# EAGLE board ArduinoMegaConnectorV2 (EAGLE 5.11)
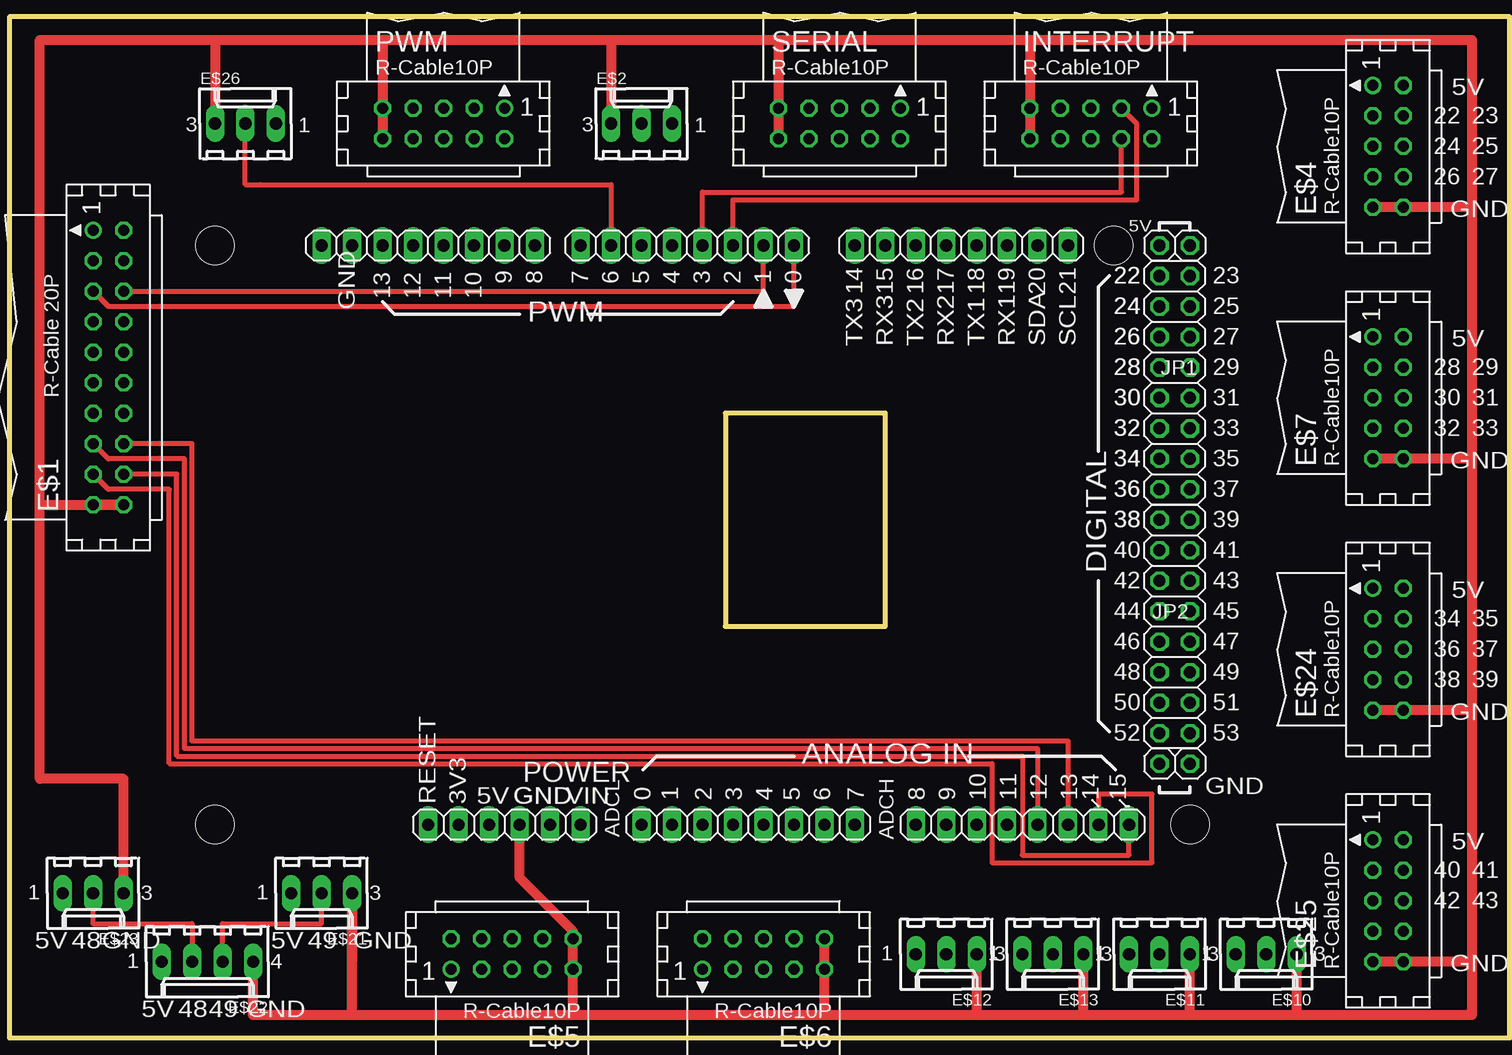
[diagram p0: board, top side]
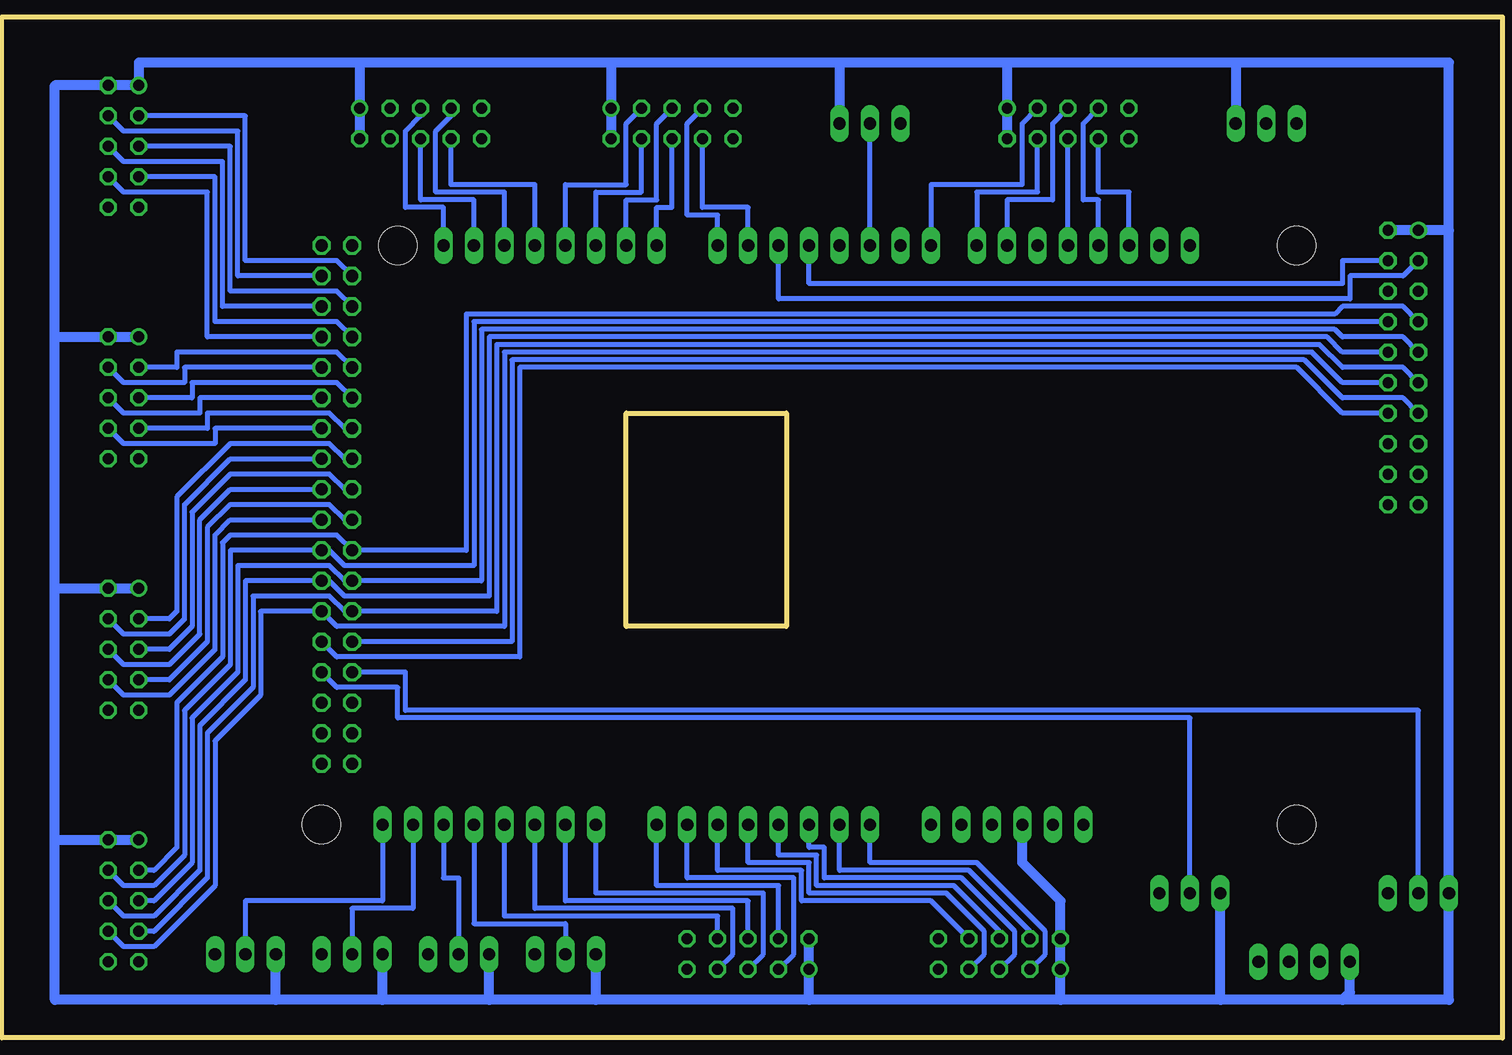
[diagram p1: board, bottom side, seen from below]

No outline drawn. Coordinates in mm, seen from the top.
Copper layers (1*16): Top 0.035mm / dielectric 1.5mm / Bottom 0.035mm
Design rules "default *": minimum track width 8mil, minimum drill 16mil, track to track 8mil, track to pad 8mil, pad to pad 8mil, via to via 10mil, smd to smd 8mil, copper to edge 40mil, drill to drill 12mil, minimum pad ring 10mil, minimum via ring 10mil, stop-mask expansion 4mil, vias tented up to drill 0mil, thermal gap 10mil
Net classes: 0 default: width 0.203 mm, drill 0.406 mm, clearance 0.203 mm; 1 power: width 0.61 mm, drill 0.711 mm, clearance 0.203 mm; 2 gnd: width 0.305 mm, drill 0.711 mm, clearance 0.203 mm; 3 usbvcc: width 0.508 mm, drill 0.711 mm, clearance 0.203 mm
Holes 3.2 mm at 98.42,17.78 17.14,66.04 92.08,66.04 17.14,17.78
Milling: 8 lines

## Footprints (pad centres in the part's own frame; a part is rotated, then mirrored left to right if it is on the bottom)
1X08 = drill 1.016 long: 1 -8.89,0; 2 -6.35,0; 3 -3.81,0; 4 -1.27,0; 5 1.27,0; 6 3.81,0; 7 6.35,0; 8 8.89,0
CON20L = drill 0.914 round: 1 11.43,1.27 | drill 0.914 octagon: 2 11.43,-1.27; 3 8.89,1.27; 4 8.89,-1.27; 5 6.35,1.27; 6 6.35,-1.27; 7 3.81,1.27; 8 3.81,-1.27; 9 1.27,1.27; 10 1.27,-1.27; 11 -1.27,1.27; 12 -1.27,-1.27; 13 -3.81,1.27; 14 -3.81,-1.27; 15 -6.35,1.27; 16 -6.35,-1.27; 17 -8.89,1.27; 18 -8.89,-1.27; 19 -11.43,1.27; 20 -11.43,-1.27
6410-03 = drill 1.016 long: 1 2.54,0; 2 0,0; 3 -2.54,0
CON10L = drill 0.914 round: 1 5.08,1.27 | drill 0.914 octagon: 2 5.08,-1.27; 3 2.54,1.27; 4 2.54,-1.27; 5 0,1.27; 6 0,-1.27; 7 -2.54,1.27; 8 -2.54,-1.27; 9 -5.08,1.27; 10 -5.08,-1.27
6410-04 = drill 1.016 long: 1 3.81,0; 2 1.27,0; 3 -1.27,0; 4 -3.81,0
2X08 = drill 1.016 octagon: 1 -8.89,-1.27; 2 -8.89,1.27; 3 -6.35,-1.27; 4 -6.35,1.27; 5 -3.81,-1.27; 6 -3.81,1.27; 7 -1.27,-1.27; 8 -1.27,1.27; 9 1.27,-1.27; 10 1.27,1.27; 11 3.81,-1.27; 12 3.81,1.27; 13 6.35,-1.27; 14 6.35,1.27; 15 8.89,-1.27; 16 8.89,1.27
1X01 = drill 1.016 octagon: 1 0,0
1X06 = drill 1.016 long: 1 -6.35,0; 2 -3.81,0; 3 -1.27,0; 4 1.27,0; 5 3.81,0; 6 6.35,0

## Placement (x,y rotation side)
ADCH  [1X08]  84.45,17.78 0 top
ADCL  [1X08]  61.59,17.78 0 top
COMMUNICATION  [1X08]  79.38,66.04 180 top
E$1  [CON20L]  8.26,55.88 90 top
E$2  [6410-03]  52.7,76.2 0 top
E$4  [CON10L]  114.94,74.3 90 top
E$5  [CON10L]  41.91,6.99 180 top
E$6  [CON10L]  62.87,6.99 180 top
E$7  [CON10L]  114.94,53.34 90 top
E$10  [6410-03]  104.78,6.99 180 top
E$11  [6410-03]  95.89,6.99 180 top
E$12  [6410-03]  78.11,6.99 180 top
E$13  [6410-03]  87,6.99 180 top
E$21  [6410-03]  26.04,12.06 180 top
E$22  [6410-04]  16.51,6.35 180 top
E$23  [6410-03]  6.99,12.06 180 top
E$24  [CON10L]  114.94,32.38 90 top
E$25  [CON10L]  114.94,11.43 90 top
E$26  [6410-03]  19.68,76.2 0 top
INTERRUPT  [CON10L]  90.17,76.2 0 top
JP1  [2X08]  97.16,54.61 90 top
JP2  [2X08]  97.16,34.29 90 top
JP3  [1X01]  95.89,66.04 0 top
JP4  [1X01]  98.42,66.04 0 top
JP5  [1X01]  95.89,22.86 0 top
JP6  [1X01]  98.42,22.86 0 top
POWER  [1X06]  41.27,17.78 0 top
PWM  [CON10L]  36.2,76.2 0 top
PWMH  [1X08]  34.92,66.04 180 top
PWML  [1X08]  56.52,66.04 180 top
SERIAL  [CON10L]  69.22,76.2 0 top

## Library data of the parts
ADCH ADCL COMMUNICATION JP1-JP6 POWER PWMH PWML = pinhead
E$1 E$4-E$7 E$24 E$25 INTERRUPT PWM SERIAL = con-harting
E$2 E$10-E$13 E$21-E$23 E$26 = con-molex

## Nets
S$2: E$7.3 JP1.10
S$3: PWM.3 PWML.8
S$4: PWM.4 PWMH.1
S$5: PWM.5 PWMH.2
S$6: PWM.6 PWMH.4
S$7: PWM.7 PWMH.5
S$8: PWM.8 PWMH.6
S$9: E$1.1 E$1.2 E$2.1 E$4.1 E$4.2 E$5.1 E$5.2 E$6.1 E$6.2 E$7.1 E$7.2 E$10.1 E$11.1 E$12.1 E$13.1 E$21.1 E$22.1 E$23.1 E$24.1 E$24.2 E$25.1 E$25.2 E$26.1 INTERRUPT.1 INTERRUPT.2 POWER.3 PWM.1 PWM.2 SERIAL.1 SERIAL.2
S$10: E$1.3 INTERRUPT.3 PWML.3
S$11: E$1.4 INTERRUPT.4 PWML.4
S$12: COMMUNICATION.1 INTERRUPT.5
S$13: COMMUNICATION.2 INTERRUPT.6
S$14: COMMUNICATION.3 INTERRUPT.7
S$15: COMMUNICATION.4 INTERRUPT.8
S$16: ADCH.5 E$1.15 E$12.2
S$17: COMMUNICATION.5 SERIAL.3
S$19: COMMUNICATION.7 SERIAL.5
S$20: COMMUNICATION.8 SERIAL.6
S$21: E$26.2 PWML.7
S$22: COMMUNICATION.6 SERIAL.4
S$23: E$4.3 JP1.16
S$24: E$4.4 JP1.15
S$25: E$4.5 JP1.14
S$26: E$4.6 JP1.13
S$27: E$4.7 JP1.12
S$28: E$4.8 JP1.11
S$29: ADCH.6 E$1.16 E$13.2
S$30: E$21.2 E$22.3 JP2.5
S$32: E$7.4 JP1.9
S$33: E$7.5 JP1.8
S$34: E$7.6 JP1.7
S$35: E$7.7 JP1.6
S$36: E$7.8 JP1.5
S$37: ADCL.1 E$5.3
S$38: ADCL.2 E$5.4
S$39: ADCL.3 E$5.5
S$40: ADCL.4 E$5.6
S$41: ADCL.5 E$5.7
S$42: ADCL.6 E$5.8
S$43: ADCL.7 E$6.3
S$44: ADCL.8 E$6.4
S$45: ADCH.1 E$6.5
S$46: ADCH.2 E$6.6
S$47: ADCH.3 E$6.7
S$48: ADCH.4 E$6.8
S$49: ADCH.7 E$1.17 E$11.2
S$50: ADCH.8 E$1.18 E$10.2
S$51: E$1.9 E$25.5 JP2.12
S$54: E$1.12 E$25.8 JP2.9
S$55: E$2.2 PWML.6
S$57: E$1.19 E$1.20 E$2.3 E$4.9 E$4.10 E$5.9 E$5.10 E$6.9 E$6.10 E$7.9 E$7.10 E$10.3 E$11.3 E$12.3 E$13.3 E$21.3 E$22.4 E$23.3 E$24.9 E$24.10 E$25.9 E$25.10 E$26.3 INTERRUPT.9 INTERRUPT.10 POWER.4 PWM.9 PWM.10 SERIAL.9 SERIAL.10
S$58: E$1.5 PWML.1 SERIAL.7
S$60: E$24.3 JP1.4
S$61: E$24.4 JP1.3
S$62: E$24.5 JP1.2
S$63: E$24.6 JP1.1
S$64: E$24.7 JP2.16
S$65: E$24.8 JP2.15
S$66: E$1.7 E$25.3 JP2.14
S$67: E$1.8 E$25.4 JP2.13
S$68: E$22.2 E$23.2 JP2.6
S$73: E$1.6 PWML.2 SERIAL.8
S$80: E$1.10 E$25.6 JP2.11
S$81: E$1.11 E$25.7 JP2.10
S$91: E$1.13 JP2.8
S$92: E$1.14 JP2.7

## Tracks (layer width: path | path; a pad name or v marks a point on that pad's centre or on a via)
S$2
  Bottom 0.406: JP1.10 97.16,57.15 110.49,57.15 110.49,55.88 E$7.3
S$3
  Bottom 0.406: PWM.3 40.01,76.2 40.01,71.12 47.62,71.12 PWML.8
S$4
  Bottom 0.406: PWM.4 38.73,70.48 40.64,70.48 41.27,70.48 43.81,70.48 PWMH.1
S$5
  Bottom 0.406: PWM.5 37.47,76.2 37.47,69.85 41.27,69.85 PWMH.2
S$6
  Bottom 0.406: PWMH.4 PWM.6
S$7
  Bottom 0.406: PWMH.5 33.66,69.85 34.92,69.85 34.92,76.2 PWM.7
S$8
  Bottom 0.406: PWMH.6 31.11,70.48 33.66,70.48 PWM.8
S$9
  Bottom 0.813: POWER.3 40.01,14.61 36.83,11.43 E$5.2 E$5.1 36.83,3.17 | E$6.2 E$6.1 57.78,3.17 | 36.83,3.17 57.78,3.17 | 75.56,3.17 E$12.1 | 57.78,3.17 75.56,3.17 | 84.45,3.17 E$13.1 | 75.56,3.17 84.45,3.17 | 93.34,3.17 E$11.1 | 84.45,3.17 93.34,3.17 | 102.23,3.17 E$10.1 | 93.34,3.17 102.23,3.17 | 102.23,3.17 120.65,3.17 120.65,16.51 | E$25.1 E$25.2 120.65,16.51 | E$24.1 E$24.2 120.65,37.47 | 120.65,16.51 120.65,37.47 | E$7.1 E$7.2 120.65,58.42 | 120.65,37.47 120.65,58.42 | 120.65,58.42 120.65,79.38 E$4.2 E$4.1 113.67,81.28 95.25,81.28 | INTERRUPT.2 INTERRUPT.1 95.25,81.28 | SERIAL.2 SERIAL.1 74.3,81.28 | 74.3,81.28 95.25,81.28 | PWM.2 PWM.1 41.27,81.28 | 55.24,81.28 74.3,81.28 | 55.24,81.28 E$2.1 | 41.27,81.28 55.24,81.28 | 22.23,81.28 41.27,81.28 | 22.23,81.28 E$26.1 | E$1.2 E$1.1 4.45,67.31 | 22.23,81.28 4.45,81.28 4.45,67.31 | 4.45,67.31 E$23.1 4.45,3.17 13.34,3.17 | 13.34,3.17 23.5,3.17 | 23.5,3.17 36.83,3.17 | 13.34,3.17 12.7,3.81 E$22.1 | 23.5,3.17 E$21.1
S$10
  Top 0.406: PWML.3 60.33,69.85 93.98,69.85 93.98,76.2 INTERRUPT.3
  Bottom 0.406: E$1.3 8.26,63.5 12.7,63.5 12.7,61.59 60.33,61.59 PWML.3
S$11
  Top 0.406: PWML.4 57.78,70.48 92.71,70.48 INTERRUPT.4
  Bottom 0.406: PWML.4 57.78,62.87 13.34,62.87 13.34,64.77 E$1.4
S$12
  Bottom 0.406: COMMUNICATION.1 88.27,69.22 91.44,69.22 91.44,75.56 90.17,76.83 INTERRUPT.5
S$13
  Bottom 0.406: COMMUNICATION.2 85.72,69.85 90.17,69.85 INTERRUPT.6
S$14
  Bottom 0.406: COMMUNICATION.3 83.19,70.48 88.9,70.48 88.9,75.56 87.63,76.83 INTERRUPT.7
S$15
  Bottom 0.406: COMMUNICATION.4 80.64,71.12 87.63,71.12 INTERRUPT.8
S$16
  Top 0.406: E$1.15 8.26,48.26 14.61,48.26 14.61,24.13 85.72,24.13 ADCH.5
  Bottom 0.406: ADCH.5 85.72,9.53 78.11,9.53 E$12.2
S$17
  Bottom 0.406: COMMUNICATION.5 78.11,71.12 73.03,71.12 73.03,76.2 SERIAL.3
S$19
  Bottom 0.406: COMMUNICATION.7 73.03,69.85 70.48,69.85 70.48,76.2 SERIAL.5
S$20
  Bottom 0.406: COMMUNICATION.8 70.48,69.22 69.22,69.22 SERIAL.6
S$21
  Top 0.406: E$26.2 19.68,71.12 20.95,71.12 50.16,71.12 PWML.7
S$22
  Bottom 0.406: 75.56,67.31 COMMUNICATION.6 75.56,70.48 71.75,70.48 SERIAL.4
S$23
  Bottom 0.406: JP1.16 97.16,64.77 104.78,64.77 104.78,76.83 E$4.3
S$24
  Bottom 0.406: E$4.4 114.94,75.56 105.41,75.56 105.41,63.5 JP1.15
S$25
  Bottom 0.406: JP1.14 97.16,62.23 106.05,62.23 106.05,74.3 E$4.5
S$26
  Bottom 0.406: E$4.6 114.94,73.03 106.68,73.03 106.68,60.96 JP1.13
S$27
  Bottom 0.406: JP1.12 97.16,59.69 107.31,59.69 107.31,71.75 E$4.7
S$28
  Bottom 0.406: E$4.8 114.94,70.48 107.95,70.48 107.95,58.42 JP1.11
S$29
  Top 0.406: E$1.16 15.24,49.53 15.24,24.77 88.27,24.77 ADCH.6
  Bottom 0.406: ADCH.6 88.27,13.34 87,13.34 E$13.2
S$30
  Top 0.406: E$21.2 26.04,9.53 17.78,9.53 E$22.3
  Bottom 0.406: JP2.5 97.16,29.21 92.08,29.21 92.08,26.67 26.04,26.67 E$21.2
S$32
  Bottom 0.406: E$7.4 114.94,54.61 109.86,54.61 109.86,55.88 JP1.9
S$33
  Bottom 0.406: JP1.8 97.16,54.61 109.22,54.61 109.22,53.34 E$7.5
S$34
  Bottom 0.406: E$7.6 114.94,52.07 108.58,52.07 108.58,53.34 JP1.7
S$35
  Bottom 0.406: JP1.6 96.52,50.8 97.79,52.07 107.95,52.07 107.95,50.8 E$7.7
S$36
  Bottom 0.406: E$7.8 114.94,49.53 107.31,49.53 107.31,50.8 JP1.5
S$37
  Bottom 0.406: ADCL.1 52.7,14.61 43.81,14.61 38.1,8.89 38.1,6.99 E$5.3
S$38
  Bottom 0.406: ADCL.2 55.24,13.97 44.45,13.97 39.37,8.89 E$5.4
S$39
  Bottom 0.406: E$5.5 40.64,6.99 40.64,8.89 45.09,13.34 56.52,13.34 56.52,15.88 57.78,15.88 ADCL.3
S$40
  Bottom 0.406: ADCL.4 60.33,15.24 57.15,15.24 57.15,12.7 45.72,12.7 41.91,8.89 E$5.6
S$41
  Bottom 0.406: ADCL.5 62.87,14.61 57.78,14.61 57.78,12.06 46.35,12.06 43.18,8.89 43.18,6.99 E$5.7
S$42
  Bottom 0.406: ADCL.6 65.41,13.97 58.42,13.97 58.42,11.43 47.62,11.43 E$5.8
S$43
  Bottom 0.406: E$6.3 59.05,6.99 59.05,13.34 67.94,13.34 ADCL.7
S$44
  Bottom 0.406: ADCL.8 70.48,12.7 60.33,12.7 E$6.4
S$45
  Bottom 0.406: E$6.5 61.59,6.99 61.59,12.06 75.56,12.06 ADCH.1
S$46
  Bottom 0.406: ADCH.2 78.11,11.43 62.87,11.43 E$6.6
S$47
  Bottom 0.406: E$6.7 64.14,6.99 64.14,10.79 80.64,10.79 ADCH.3
S$48
  Bottom 0.406: ADCH.4 83.19,10.16 65.41,10.16 E$6.8
S$49
  Top 0.406: E$1.17 8.26,45.72 13.34,45.72 13.34,22.86 81.92,22.86 81.92,14.61 95.25,14.61 95.25,20.32 90.81,20.32 ADCH.7
  Bottom 0.406: ADCH.7 90.81,10.79 95.89,10.79 E$11.2
S$50
  Top 0.406: ADCH.8 93.34,15.24 84.45,15.24 84.45,23.5 13.97,23.5 13.97,46.99 E$1.18
  Bottom 0.406: E$10.2 104.78,11.43 93.34,11.43 ADCH.8
S$51
  Bottom 0.406: E$25.5 112.39,11.43 109.22,14.61 109.22,26.67 105.41,30.48 105.41,39.37 97.79,39.37 96.52,38.1 JP2.12 85.09,38.1 85.09,59.05 13.97,59.05 13.34,58.42 8.26,58.42 E$1.9
S$54
  Bottom 0.406: E$25.8 114.94,7.62 112.39,7.62 107.31,12.7 107.31,24.77 103.5,28.57 103.5,35.56 JP2.9 97.16,34.29 83.19,34.29 83.19,57.15 15.88,57.15 13.34,54.61 E$1.12
S$55
  Bottom 0.406: PWML.6 E$2.2
S$57
  Top 0.813: POWER.4 42.55,13.34 46.99,8.89 E$5.10 E$5.9 46.99,1.91 | E$6.10 E$6.9 67.94,1.91 | 67.94,1.91 46.99,1.91 | 80.64,1.91 67.94,1.91 | 80.64,1.91 E$12.3 | 89.53,1.91 80.64,1.91 | 89.53,1.91 E$13.3 | 98.42,1.91 E$11.3 | 98.42,1.91 89.53,1.91 | 107.31,1.91 E$10.3 | 107.31,1.91 98.42,1.91 | E$25.9 E$25.10 121.92,6.35 | 107.31,1.91 121.92,1.91 121.92,6.35 | E$24.9 E$24.10 121.92,27.3 | 121.92,27.3 121.92,6.35 | E$7.9 E$7.10 121.92,48.26 | 121.92,48.26 121.92,27.3 | E$4.9 E$4.10 121.92,69.22 | 121.92,69.22 121.92,48.26 | INTERRUPT.10 INTERRUPT.9 85.09,83.19 | 121.92,69.22 121.92,83.19 85.09,83.19 | 28.57,6.35 E$21.3 28.57,1.91 | SERIAL.10 SERIAL.9 64.14,83.19 | 64.14,83.19 85.09,83.19 | 50.16,83.19 64.14,83.19 | 50.16,83.19 E$2.3 | PWM.10 PWM.9 31.11,83.19 | 31.11,83.19 50.16,83.19 | 17.14,83.19 31.11,83.19 | 17.14,83.19 E$26.3 | 17.14,83.19 2.54,83.19 2.54,44.45 | E$1.19 E$1.20 2.54,44.45 | 46.99,1.91 28.57,1.91 | E$23.3 9.53,21.59 2.54,21.59 2.54,44.45 | E$22.4 20.32,1.91 28.57,1.91
S$58
  Top 0.406: E$1.5 8.26,60.96 65.41,60.96 PWML.1
  Bottom 0.406: PWML.1 65.41,68.58 67.94,68.58 67.94,76.2 SERIAL.7
S$60
  Bottom 0.406: JP1.4 96.52,48.26 97.79,49.53 106.05,49.53 110.49,45.09 110.49,35.56 111.12,34.92 E$24.3
S$61
  Bottom 0.406: E$24.4 114.94,33.66 111.12,33.66 109.86,34.92 109.86,44.45 106.05,48.26 JP1.3
S$62
  Bottom 0.406: JP1.2 96.52,45.72 97.79,46.99 106.05,46.99 109.22,43.81 109.22,34.29 111.12,32.38 E$24.5
S$63
  Bottom 0.406: E$24.6 114.94,31.11 111.12,31.11 108.58,33.66 108.58,43.18 106.05,45.72 JP1.1
S$64
  Bottom 0.406: JP2.16 96.52,43.18 97.79,44.45 106.05,44.45 107.95,42.55 107.95,33.02 111.12,29.84 E$24.7
S$65
  Bottom 0.406: E$24.8 114.94,28.57 111.12,28.57 107.31,32.38 107.31,41.91 106.05,43.18 JP2.15
S$66
  Bottom 0.406: E$1.7 8.26,60.96 13.34,60.96 13.97,60.33 86.36,60.33 86.36,40.64 JP2.14 97.16,41.91 106.05,41.91 106.68,41.27 106.68,31.75 110.49,27.94 110.49,15.88 112.39,13.97 E$25.3
S$67
  Bottom 0.406: E$25.4 114.94,12.7 112.39,12.7 109.86,15.24 109.86,27.3 106.05,31.11 106.05,40.64 JP2.13 97.79,40.64 96.52,39.37 85.72,39.37 85.72,59.69 E$1.8
S$68
  Top 0.406: E$22.2 15.24,9.53 6.99,9.53 E$23.2
  Bottom 0.406: JP2.6 91.44,30.48 91.44,27.3 6.99,27.3 E$23.2
S$73
  Top 0.406: PWML.2 62.87,62.23 E$1.6
  Bottom 0.406: SERIAL.8 66.67,69.22 62.87,69.22 PWML.2
S$80
  Bottom 0.406: E$25.6 114.94,10.16 112.39,10.16 108.58,13.97 108.58,26.04 104.78,29.84 104.78,38.1 JP2.11 97.79,38.1 96.52,36.83 84.45,36.83 84.45,58.42 14.61,58.42 13.34,57.15 E$1.10
S$81
  Bottom 0.406: E$25.7 112.39,8.89 107.95,13.34 107.95,25.4 104.14,29.21 104.14,36.83 97.79,36.83 96.52,35.56 JP2.10 83.82,35.56 83.82,57.78 15.24,57.78 13.34,55.88 8.26,55.88 E$1.11
S$91
  Bottom 0.406: E$1.13 8.26,53.34 13.34,53.34 16.51,56.52 82.55,56.52 82.55,33.02 JP2.8
S$92
  Bottom 0.406: JP2.7 97.16,31.75 81.92,31.75 81.92,55.88 17.14,55.88 13.34,52.07 E$1.14

## Text on the board
tPlace: 5V | 22 | 23 | 24 | 25 | 26 | 27 | 5V | GND | 9 | 8 | 7 | 6 | 5 | 4 | 3 | 2 | 1 | 0 | 22 | 22 | 23 | 13 | 12 | 11 | 10 | 14 | 15 | 16 | 17 | 18 | 19 | 20 | 21 | 24 | 24 | 25 | TX3 | RX3 | TX2 | RX2 | TX1 | RX1 | SDA | SCL | 26 | 26 | 27 | 5V | 28 | 28 | 29 | 28 | 29 | 30 | 30 | 31 | 30 | 31 | 32 | 32 | 33 | 32 | 33 | 34 | 34 | 35 | GND | 36 | 36 | 37 | 38 | 38 | 39 | 40 | 41 | DIGITAL | 42 | 43 | 5V | 44 | 45 | 34 | 35 | 46 | 47 | 36 | 37 | 48 | 49 | 38 | 39 | 50 | 51 | GND | 52 | 53 | ANALOG IN | 5V | GND | GND | VIN | 0 | 1 | 2 | 3 | 4 | 5 | 6 | 7 | 8 | 9 | 10 | 11 | 12 | 13 | 14 | 15 | GND | RESET | 3V3 | 5V | 40 | 41 | 42 | 43 | 5V | 48 | GND | 5V | 49 | GND | GND | 5V | 48 | 49 | GND
tNames: GND | PWM